# Altium PCB PD_PCB.PcbDoc
Units mil, origin at the board's own origin, x right, y up, seen from the top; angles counter-clockwise.
Board outline 6000 x 4000 mil, 2 copper layers (Top Layer, Bottom Layer); 7 components, 4 nets, 14 pads, 0 vias.
Unrouted connection lines stored in the file: 10.
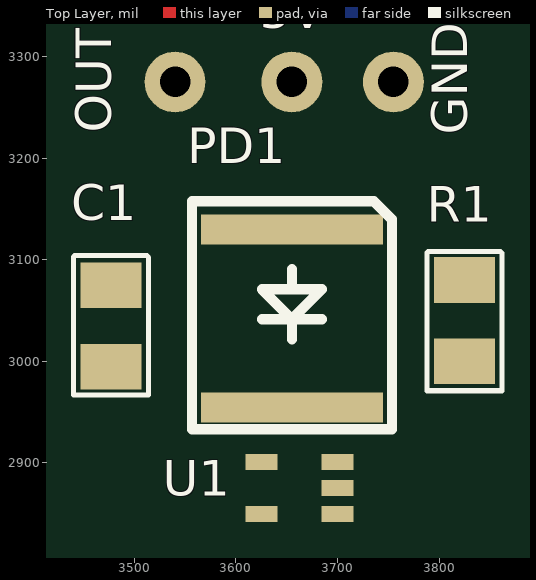
[diagram p0: Top Layer view]
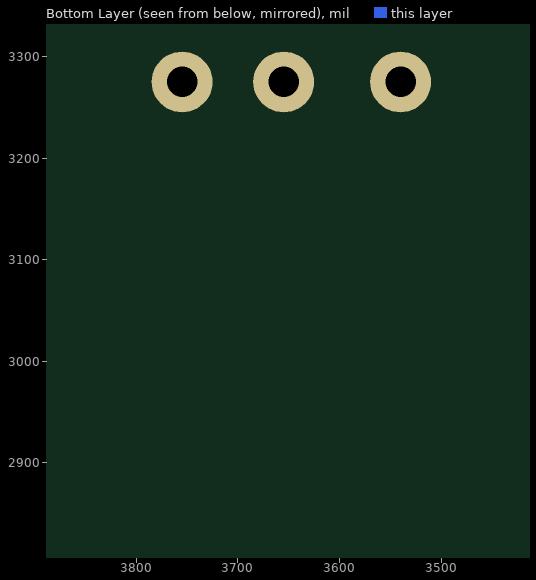
[diagram p1: Bottom Layer view, seen from below]

## Layer stack, top to bottom
Top Solder: solder mask 0.4, Solder Resist, Dk 3.5
Top Layer: signal copper 1.4
Dielectric 1: dielectric 12.6, FR-4, Dk 4.8
Bottom Layer: signal copper 1.4
Bottom Solder: solder mask 0.4, Solder Resist, Dk 3.5

## Board outline
1000,1000 7000,1000 7000,5000 1000,5000

## Design rules (kind name [scope] priority, off if disabled: settings)
Clearance [All] p1: gap=10 ignorepadtopadclearanceinfootprint=FALSE except(0: Arc-Hole Track-Hole SMDPad-Hole THPad-Hole Via-Hole Fill-Hole Poly-Hole Region-Hole Text-Hole)
PolygonConnect [All] p1: connectstyle=Relief reliefconductorwidth=10 reliefentries=4 polygonreliefangle="90 Angle" airgapwidth=10
RoutingVias [All] p1: holewidth=28 width=50 viastyle="Through Hole" minholewidth=28 minwidth=50 maxholewidth=28 maxwidth=50
SolderMaskExpansion [All] p1: expansion=4 istentingtop=FALSE
Width [All] p1: maxlimit=10 minlimit=10 preferedwidth=10
30 further rules are at their usual default settings.

## Components (designator, comment, footprint, x,y, rotation, side; value= is the part's Value field where it differs from the comment)
5V "24AWG hole" "24AWG hole" 3655,3275 r0 top
C1 "100 nF" "CAP 0805" 3470,3030 r90 top value="5 pF"
GND "24AWG hole" "24AWG hole" 3755,3275 r90 top
OUT "24AWG hole" "24AWG hole" 3540,3275 r90 top
PD1 "TEMD5080X01" "Photodiode SMD PKG-1" 3655,3130 r0 top
R1 "RES 0805" "RES 0805" 3812.68,3078.98 r90 top value=10k
U1 "TSZ121" SC-70-5 3625,2850 r90 top

## Footprints (in the part's own frame and the unit in brackets; to place one, negate y for a bottom-side part, rotate by r counter-clockwise, add the part's x,y. Pads: shape width x height; smd on the part's side, far side on the other; paste and mask are expansions set on the pad)
"24AWG hole" [mil]
  round 60 hole 30: 1(0,0)
"CAP 0805" [mil]
  rect 45x60 smd: 1(44.84,-7.2) 2(-35.16,-7.2)
  silkscreen extent -63,-44 74,30, body extent -35,-32 44,17, height 31
"Photodiode SMD PKG-1" [mm] "package type 1 -"
  rect 4.55x0.75 smd: 1(0,0) 2(0,-4.45)
  silkscreen extent -2.5,-5 2.5,0.7, body extent -2.15,-4.75 2.05,0.25, height 1.12
"RES 0805" [mil]
  rect 45x60 smd: 1(1.02,-12.32) 2(-78.98,-12.32)
  silkscreen extent -108,-49 29,25, body extent -84,-39 6,14, height 30
SC-70-5 [mm]
  rect 0.4x0.8 smd: 1(0,-1.9) 2(0.65,-1.9) 3(1.3,-1.9) 4(1.3,0) 5(0,0)
  body extent -0.34,-1.91 1.66,0.19, height 0.93

## Part data
C1: library part "CAP 0805"
PD1: "PIN Sillicium photodiode."
R1: "SMD Resistor 0805"

## Nets (pads, with @x,y where several pads share a name; then routed paths per layer and width w, separated by ;. In a path a pad name is that pad's centre, name@x,y a point inside that pad or via, vN(x,y) a via of type N, cw(c..) or ccw(c..) an arc to the next point about the centre after c; other vN are vias at no path point)
GND: GND.1 PD1.1 U1.1 U1.2
NetC1_1: C1.1 PD1.2 R1.1 U1.3
NetC1_2: C1.2 OUT.1 R1.2 U1.4
VCC: 5V.1 U1.5